# Altium PCB Cuttomized_Industrial_controller.PcbDoc (part 1 of 2)
Units mil, origin at the board's own origin, x right, y up, seen from the top; angles counter-clockwise.
Board outline 5820 x 4455 mil, 2 copper layers (Top Layer, Bottom Layer); 131 components, 106 nets, 448 pads, 121 vias.
Unrouted connection lines stored in the file: 64.
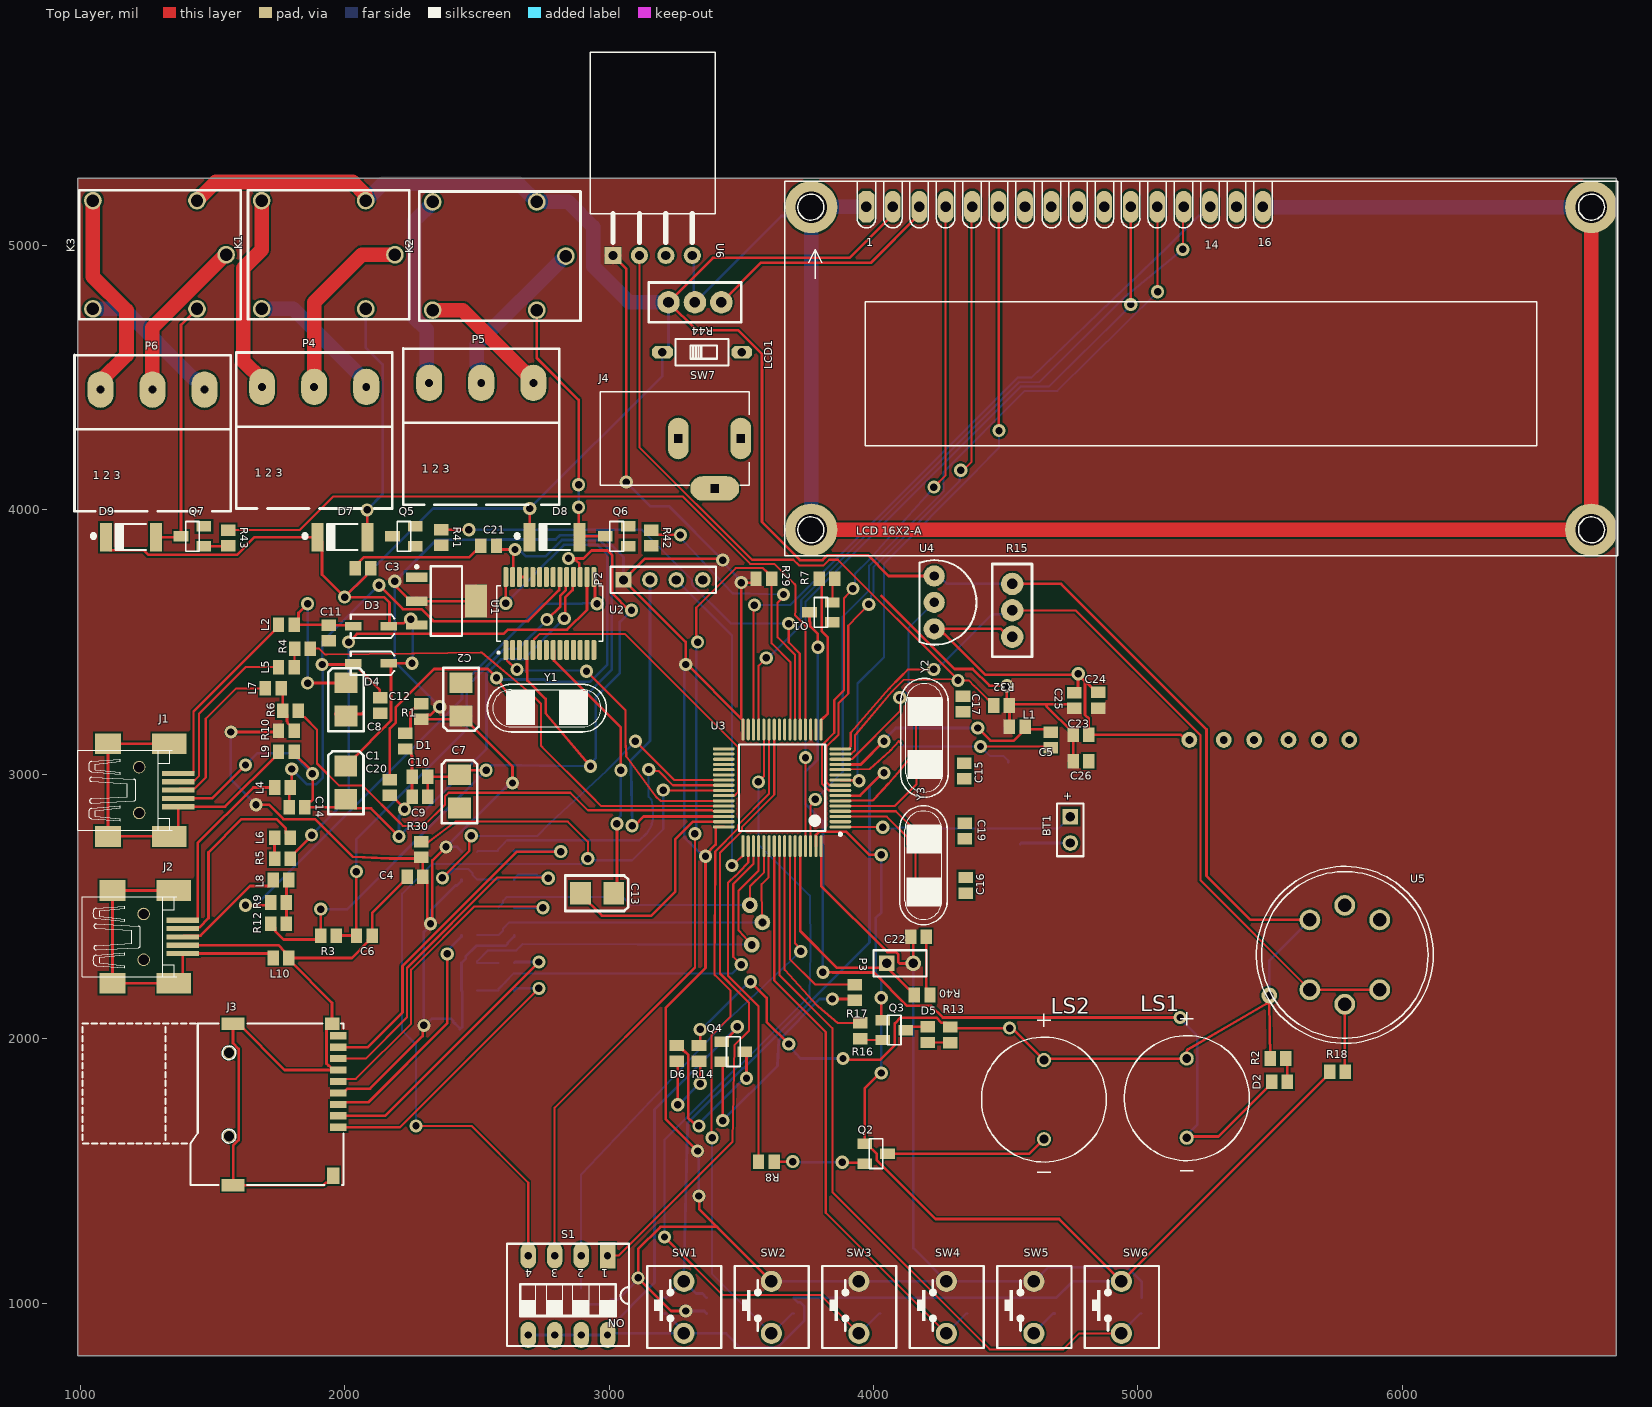
[diagram p0: Top Layer view]
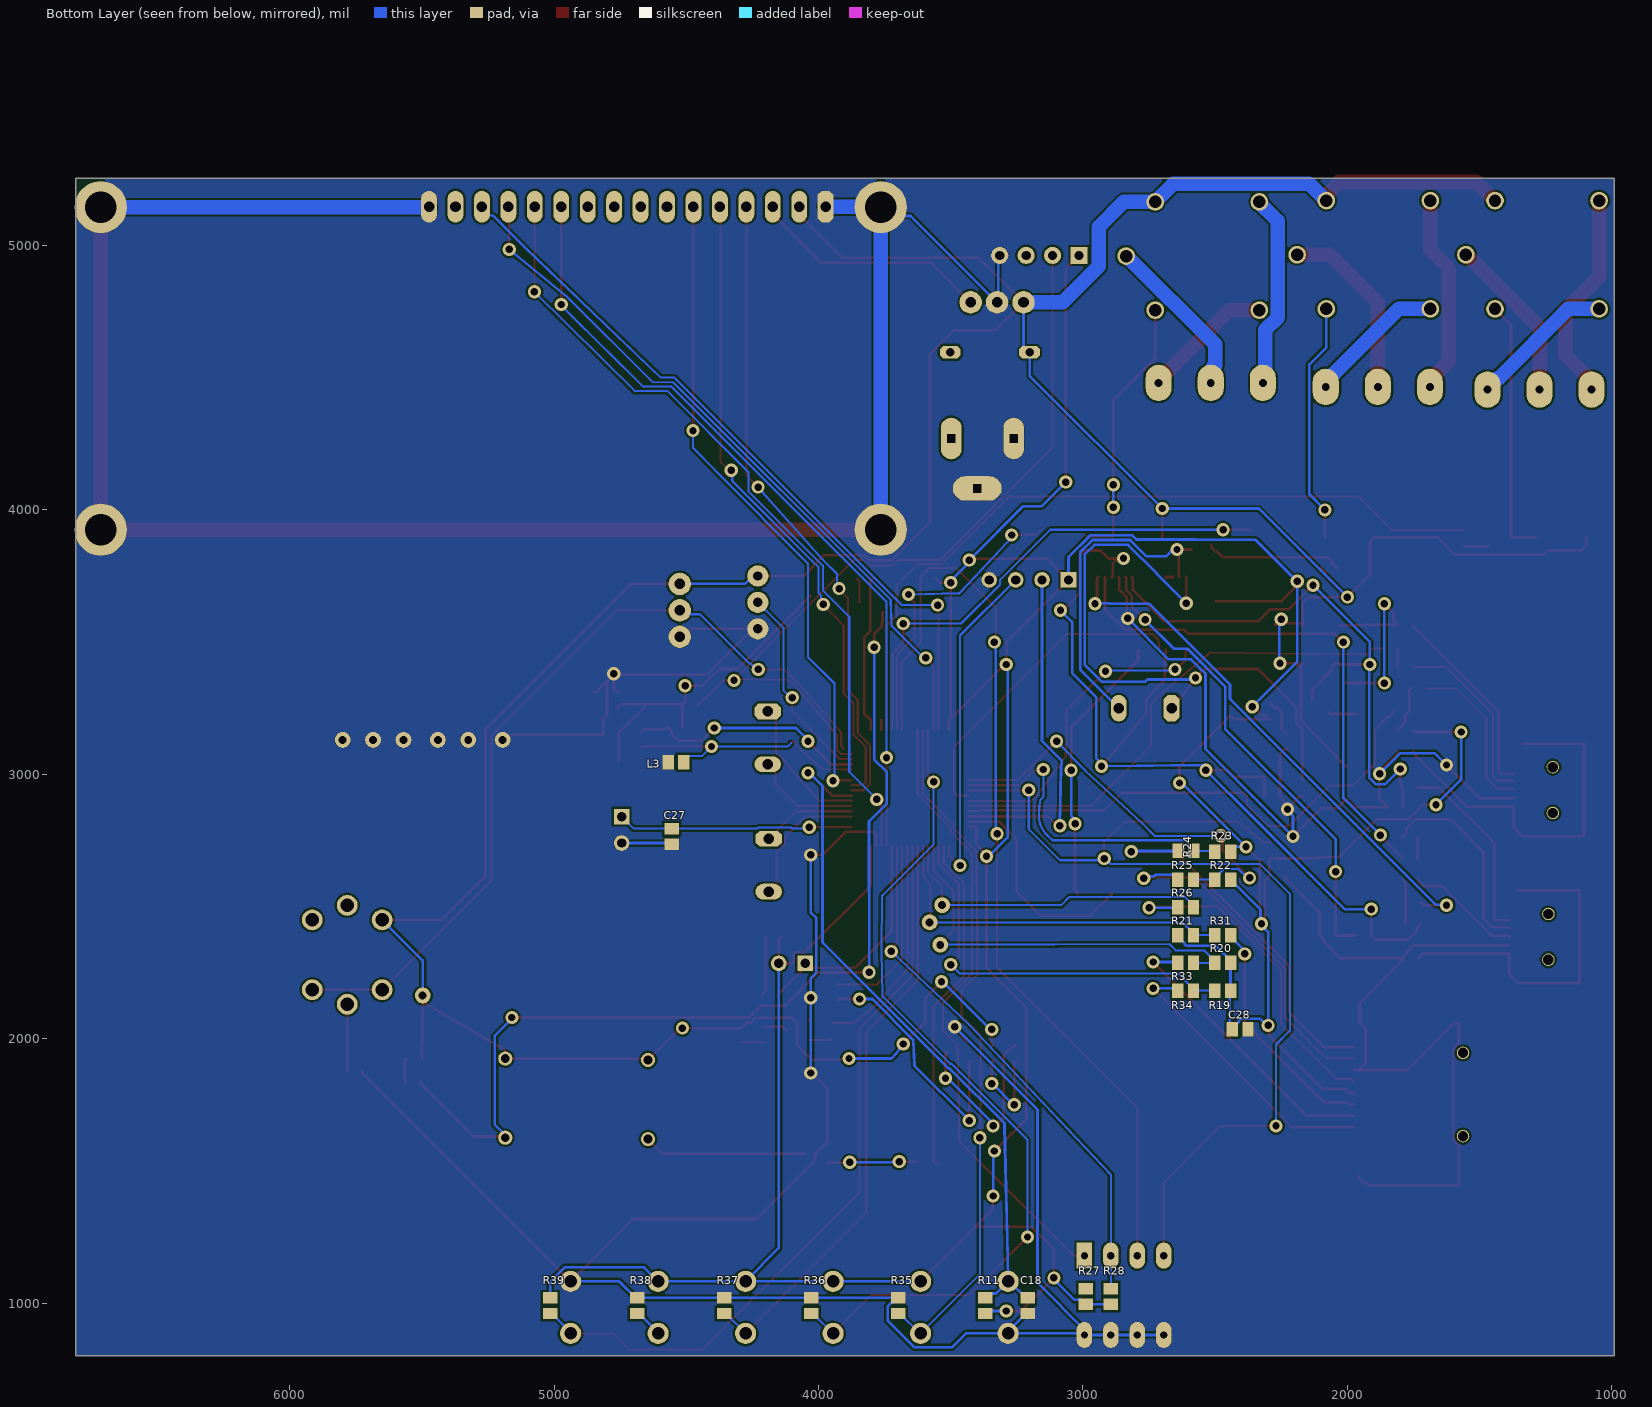
[diagram p1: Bottom Layer view, seen from below]

## Layer stack, top to bottom
Top Solder: solder mask 0.4, Solder Resist, Dk 3.5
Top Layer: signal copper 1.4
Dielectric 1: dielectric 12.6, FR-4, Dk 4.8
Bottom Layer: signal copper 1.4
Bottom Solder: solder mask 0.4, Solder Resist, Dk 3.5

## Board outline
990,800 990,5255 6810,5255 6810,800

## Design rules (kind name [scope] priority, off if disabled: settings)
Clearance Clearance_3 [InNamedPolygon('TOP GND_A')] p1: gap=40 ignorepadtopadclearanceinfootprint=FALSE
Clearance Clearance_2 [InNamedPolygon('TOP GND')] p2: gap=40 ignorepadtopadclearanceinfootprint=FALSE
Clearance Clearance_1 [InNamedPolygon('TOP GND')] p3: gap=40 ignorepadtopadclearanceinfootprint=FALSE
Clearance [All] p4: gap=8 ignorepadtopadclearanceinfootprint=FALSE
PolygonConnect [All vs IsNamedPolygon('TOP GND_A')] p1: thpad.connectstyle=Relief thpad.reliefconductorwidth=20 thpad.reliefentries=4 thpad.polygonreliefangle="90 Angle" thpad.airgapwidth=20 smdpad.connectstyle=Relief smdpad.reliefconductorwidth=20 smdpad.reliefentries=4 smdpad.polygonreliefangle="90 Angle" smdpad.airgapwidth=20 via.connectstyle=Direct via.reliefconductorwidth=10 via.reliefentries=4 via.polygonreliefangle="90 Angle" via.airgapwidth=10
PolygonConnect PolygonConnect_2 [All vs IsNamedPolygon('BOTTOM GND')] p2: thpad.connectstyle=Relief thpad.reliefconductorwidth=20 thpad.reliefentries=4 thpad.polygonreliefangle="90 Angle" thpad.airgapwidth=20 smdpad.connectstyle=Relief smdpad.reliefconductorwidth=20 smdpad.reliefentries=4 smdpad.polygonreliefangle="90 Angle" smdpad.airgapwidth=20 via.connectstyle=Direct via.reliefconductorwidth=10 via.reliefentries=4 via.polygonreliefangle="90 Angle" via.airgapwidth=10
PolygonConnect PolygonConnect_1 [All vs IsNamedPolygon('TOP GND')] p3: thpad.connectstyle=Relief thpad.reliefconductorwidth=20 thpad.reliefentries=4 thpad.polygonreliefangle="90 Angle" thpad.airgapwidth=20 smdpad.connectstyle=Relief smdpad.reliefconductorwidth=20 smdpad.reliefentries=4 smdpad.polygonreliefangle="90 Angle" smdpad.airgapwidth=20 via.connectstyle=Direct via.reliefconductorwidth=10 via.reliefentries=4 via.polygonreliefangle="90 Angle" via.airgapwidth=10
RoutingVias [All] p1: holewidth=28 width=50 viastyle="Through Hole" minholewidth=28 minwidth=50 maxholewidth=28 maxwidth=50
SolderMaskExpansion [All] p1: expansion=4 istentingtop=FALSE
Width [All] p1: maxlimit=55 minlimit=8 preferedwidth=10 minimp=50.000000 maximp=50.000000 favimp=50.000000
30 further rules are at their usual default settings.

## Components (designator, comment, footprint, x,y, rotation, side; value= is the part's Value field where it differs from the comment)
BT1 "Battery" BAT-2 4745.2,2790 r270 top
C1 "10uF" CAP_tantal 2004.49,2968.52 r270 top
C2 "10uF" CAP_tantal 2440,3282.99 r90 top
C3 "" C0805 2069.57,3780 r0 top value=100nF
C4 "" C0805 2266.38,2613.11 r0 top value=100nF
C5 "" C0805 4670,3129.53 r90 top value="100 nF"
C6 "Cap" C0805 2074.57,2390 r180 top value=100nF
C7 "10uF" CAP_tantal 2435,2935 r270 top
C8 "10uF" CAP_tantal 2005,3282.99 r270 top
C9 "Cap" C0805 2284.57,2915 r0 top value=100nF
C10 "Cap" C0805 2284.57,2990 r0 top value=100nF
C11 "" C0805 1940,3534.53 r90 top value=100nF
C12 "" C0805 2135,3260 r90 top value=100nF
C13 "10uF" CAP_tantal 2955,2550 r180 top
C14 "" C0805 1820.47,2875 r180 top value=100nF
C15 "Cap" C0805 4343.82,3012.27 r90 top value=18pF
C16 "Cap" C0805 4350,2580 r270 top value=18pF
C17 "Cap" C0805 4338.82,3266.33 r270 top value=18pF
C18 "" C0805 3209.57,990 r90 bottom value="100 nF"
C19 "Cap" C0805 4345,2785 r270 top value=18pF
C20 "Cap" C0805 2170.86,2950 r90 top value=10pF
C21 "Cap" C0805 2545,3865 r0 top value=10pF
C22 "" C0805 4170,2385 r180 top value="100 nF"
C23 "" C0805 4785.47,3150 r180 top value="100 nF"
C24 "" C0805 4850,3280 r270 top value="100 nF"
C25 "" C0805 4760,3279.53 r270 top value="100 nF"
C26 "" C0805 4785,3050 r180 top value="100 nF"
C27 "" C0805 4555,2765 r90 bottom value="100 nF"
C28 "Cap" C0805 2405.47,2035 r0 bottom value=100nF
D1 "LED0" C0805 2230,3125 r270 top
D2 "LED0" C0805 5535.47,1836.94 r180 top
D3 "Diode 1N4148" SOD-123 2100,3560 r0 top
D4 "Diode 1N4148" SOD-123 2100,3420 r0 top
D5 "LED0" C0805 4205,2015 r90 top
D6 "LED0" C0805 3255.5,1944.65 r90 top
D7 "SUF4007" DIOMELF5025N 1991.58,3897.05 r0 top
D8 "SUF4007" DIOMELF5025N 2794.57,3897.05 r0 top
D9 "SUF4007" DIOMELF5025N 1191.58,3897.05 r0 top
J1 "Mini_USB" USB_mini 1223.11,2940.19 r0 top
J2 "Mini_USB" USB_mini 1240,2385 r0 top
J3 "MMC-uSD" SD-MicroSD_1 1769.39,1751.34 r270 top
J4 "DC-005" NINIGI_DC-005 3400,4270 r0 top
K1 "Relay" "Relay 5A" 1938.03,4965 r90 top
K2 "Relay" "Relay 5A" 2585,4960 r90 top
K3 "Relay" "Relay 5A" 1300,4965 r90 top
L1 "Inductor" C0805 4544.06,3180 r0 top value=10uH
L2 "FERRIT BEAD" C0805 1779.57,3565 r180 top
L3 "Inductor" C0805 4539.53,3045 r180 bottom value=10uH
L4 "FERRIT BEAD" C0805 1764.57,2950 r180 top
L5 "FERRIT BEAD" C0805 1779.57,3405 r180 top
L6 "FERRIT BEAD" C0805 1764.57,2760 r0 top
L7 "FERRIT BEAD" C0805 1730,3325 r180 top
L8 "FERRIT BEAD" C0805 1759.57,2600 r180 top
L9 "FERRIT BEAD" C0805 1779.57,3085 r180 top
L10 "FERRIT BEAD" C0805 1759.57,2305 r180 top
LCD1 "LCD2x16" "LCD 2*16" 5133.35,4506.69 r0 top
LS1 "AI-1223-TWT-12V-R" XDCR_AI-1223-TWT-12V-R 5185,1775 r0 top
LS2 "AI-1223-TWT-12V-R" XDCR_AI-1223-TWT-12V-R 4645,1769.61 r0 top
P2 "Header 4" HDR1X4 3055,3735 r0 top
P3 "Header 2" HDR1X2 4050.8,2284.53 r0 top
P4 "Header 3" "phoenix terminal 3" 1590,4005 r0 top
P5 "Header 3" "phoenix terminal 3" 2221.85,4020 r0 top
P6 "Header 3" "phoenix terminal 3" 978.15,3995 r0 top
Q1 "BC107" SOT23 3801.69,3612.4 r90 top
Q2 "BC107" SOT23 4010,1565 r270 top
Q3 "BC107" SOT23 4078.31,2032.4 r270 top
Q4 "BC107" SOT23 3470.5,1950.55 r270 top
Q5 "MMBT2222A" SOT23 2224.57,3900 r90 top
Q6 "MMBT2222A" SOT23 3029.57,3900 r90 top
Q7 "MMBT2222A" SOT23 1424.57,3900 r90 top
R1 "330" C0805 2289.87,3237.99 r270 top
R2 "" C0805 5530,1925 r0 top value=220
R3 "" C0805 1939.57,2390 r0 top value=10K
R4 "" C0805 1840.47,3475 r0 top value=22
R5 "" C0805 1764.57,2680 r0 top value=22
R6 "" C0805 1795,3240 r0 top value=22
R7 "" C0805 3825,3740 r180 top value=1K
R8 "" C0805 3595,1535 r180 top value=1K
R9 "" C0805 1750.47,2515 r180 top value=22
R10 "" C0805 1779.57,3164.17 r180 top value=1.5K
R11 "10 K" C0805 3369.57,990 r270 bottom
R12 "" C0805 1750,2435 r180 top value=1.5K
R13 "" C0805 4290,2014.53 r270 top value=330
R14 "" C0805 3340.5,1944.65 r270 top value=330
R15 "1k" Multi-Turn 4525,3620 r270 top
R16 "" C0805 3950,2030 r270 top value=1K
R17 "" C0805 3930,2174.53 r270 top value=1K
R18 "" C0805 5755,1875 r0 top value=33
R19 "" C0805 2471.5,2181.67 r0 bottom value=10K
R20 "" C0805 2471.5,2286.67 r0 bottom value=10K
R21 "" C0805 2611.5,2391.67 r180 bottom value=10K
R22 "" C0805 2471.5,2601.67 r0 bottom value=10K
R23 "" C0805 2471.5,2706.67 r0 bottom value=10K
R24 "" C0805 2610,2710 r0 bottom value=22
R25 "" C0805 2611.5,2601.67 r0 bottom value=22
R26 "" C0805 2611.5,2496.67 r0 bottom value=22
R27 "" C0805 2989.57,1025 r90 bottom value=10K
R28 "" C0805 2894.57,1025 r90 bottom value=10K
R29 "" C0805 3585.47,3740 r0 top value=10K
R30 "" C0805 2290,2715 r90 top value=10K
R31 "" C0805 2471.5,2391.67 r180 bottom value=22
R32 "" C0805 4485,3260 r0 top value=5K
R33 "" C0805 2611.5,2286.67 r0 bottom value=22
R34 "" C0805 2611.5,2181.67 r0 bottom value=22
R35 "" C0805 3698.57,990 r90 bottom value=10K
R36 "" C0805 4027.57,990 r90 bottom value=10K
R37 "" C0805 4356.57,990 r90 bottom value=10K
R38 "" C0805 4685.57,990 r90 bottom value=10K
R39 "" C0805 5014.57,990 r90 bottom value=10K
R40 "" C0805 4184.53,2165 r0 top value=10K
R41 "" C0805 2365,3895 r270 top value=1K
R42 "" C0805 3159.57,3894.09 r270 top value=1K
R43 "" C0805 1559.57,3894.09 r270 top value=1K
R44 "RPot" Multi-Turn 3325,4785 r0 top value=1K
S1 "SW DIP-4" "dip switch x4" 6519.57,2064.21 r180 top
SW1 "?" "Sw_Tact 2PIN" 3284.57,980 r0 top
SW2 "?" "Sw_Tact 2PIN" 3615.57,980 r0 top
SW3 "?" "Sw_Tact 2PIN" 3946.57,980 r0 top
SW4 "?" "Sw_Tact 2PIN" 4277.57,980 r0 top
SW5 "?" "Sw_Tact 2PIN" 4608.57,980 r0 top
SW6 "?" "Sw_Tact 2PIN" 4939.57,980 r0 top
SW7 "SW-SPST" "DSW 1" 3356.84,4600.97 r270 top
U1 "AMS1117" SOT223_L 2385,3655 r0 top
U2 "PL-2303" SOP65P780X200-28N 2776.02,3607.99 r90 top
U3 "STM32F103RET6" LQFP64 3654.53,2948.58 r180 top
U4 "LM35" TO-92 4230,3650 r270 top
U5 "MQ-2" SNR6-D19.0MM 5782.91,2317.09 r0 top
U6 "TEM-HUM-DHT11(4P-15.5X12.0MM)" SNR4-2.54-15.5X12.0X5.5MM 3165,5425 r90 top
Y1 "12MHz" Xtal 2771,3241 r0 top
Y2 "8 MHz" Xtal 4183.82,3131.8 r270 top
Y3 "8 MHz" Xtal 4180,2650 r270 top

## Footprints (in the part's own frame and the unit in brackets; to place one, negate y for a bottom-side part, rotate by r counter-clockwise, add the part's x,y. Pads: shape width x height; smd on the part's side, far side on the other; paste and mask are expansions set on the pad)
BAT-2 [mm] "Battery; 2 Leads"
  rect 1.5x1.5 hole 0.9: 1(-1.27,0)
  round 1.5 hole 0.9: 2(1.27,0)
  silkscreen extent -2.54,-1.27 2.54,1.27
C0805 [mm] "Chip Capacitor, Body 2.0x1.3mm, IPC High Density"
  rect 1.1x1.4 smd: 1(-0.75,0) 2(0.75,0)
  body extent -1.1,-0.72 1.1,0.72, height 1.4
CAP_tantal [mm] "Capacitor 3.5x2.8mm (B-Case)"
  rect 2x2.2 smd paste+0.038 mask+0.038: 1(1.6,0) 2(-1.6,0)
  silkscreen extent -3,-1.7 3.05,1.7, body extent -1.77,-1.41 1.79,1.41, height 0.65
DIOMELF5025N [mm]
  rect 1.15x2.75 smd: A(2.4,0) C(-2.4,0)
  silkscreen extent -3.92,-1.25 1.45,1.25
"dip switch x4" [mm]
  rect 1.5x2.5 hole 0.7: 1(89.535,22.479)
  oval 1.5x2.5 hole 0.7: 2(92.075,22.479) 3(94.615,22.479) 4(97.155,22.479) 5(97.155,30.099) 6(94.615,30.099) 7(92.075,30.099) 8(89.535,30.099)
  silkscreen extent 87.49,21.34 99.19,31.15, body extent 87.54,21.34 99.15,31.24, height 6.8
"DSW 1" [mm]
  oct 1.2x2 hole 0.8: 1(0.12,-3.935) 2(0.12,3.685)
  silkscreen extent -1.15,-2.67 1.4,2.41, body extent -1.17,-5.08 1.37,4.82, height 7.4
HDR1X2 [mm] "Connector; Header; 2 Position"
  rect 1.5x1.5 hole 0.9: 1(0,0)
  round 1.5 hole 0.9: 2(2.54,0)
  silkscreen extent -1.27,-1.27 3.81,1.27
HDR1X4 [mm] "Connector; Header; 4 Position"
  rect 1.5x1.5 hole 0.9: 1(0,0)
  round 1.5 hole 0.9: 2(2.54,0) 3(5.08,0) 4(7.62,0)
  silkscreen extent -1.27,-1.27 8.89,1.27
"LCD 2*16" [mil] "LCD"
  round 196.85 hole 118.11: 1(-1368.35,-581.69) 1(-1368.35,638.31) 1(1581.65,-581.69) 1(1581.65,638.31)
  oct 60x120 hole 40: 1(-1160,640)
  oval 60x120 hole 40: 2(-1060,640) 3(-960,640) 4(-860,640) 5(-760,640) 6(-660,640) 7(-560,640) 8(-460,640) 9(-360,640) 10(-260,640) 11(-160,640) 12(-60,640) 13(40,640) 14(140,640) 15(240,640) 16(340,640)
  silkscreen extent -1468,-681 1681,737, body extent -1470,-681 1679,736, height 453
LQFP64 [mm] "Thin QFP, 64-Leads, Body 10x10mm, Pitch 0.5mm, IPC Low Density"
  oval 2.1x0.3 smd: 1(-5.6,3.75) 2(-5.6,3.25) 3(-5.6,2.75) 4(-5.6,2.25) 5(-5.6,1.75) 6(-5.6,1.25) 7(-5.6,0.75) 8(-5.6,0.25) 9(-5.6,-0.25) 10(-5.6,-0.75) 11(-5.6,-1.25) 12(-5.6,-1.75) 13(-5.6,-2.25) 14(-5.6,-2.75) 15(-5.6,-3.25) 16(-5.6,-3.75) 33(5.6,-3.75) 34(5.6,-3.25) 35(5.6,-2.75) 36(5.6,-2.25) 37(5.6,-1.75) 38(5.6,-1.25) 39(5.6,-0.75) 40(5.6,-0.25) 41(5.6,0.25) 42(5.6,0.75) 43(5.6,1.25) 44(5.6,1.75) 45(5.6,2.25) 46(5.6,2.75) 47(5.6,3.25) 48(5.6,3.75)
  oval 0.3x2.1 smd: 17(-3.75,-5.6) 18(-3.25,-5.6) 19(-2.75,-5.6) 20(-2.25,-5.6) 21(-1.75,-5.6) 22(-1.25,-5.6) 23(-0.75,-5.6) 24(-0.25,-5.6) 25(0.25,-5.6) 26(0.75,-5.6) 27(1.25,-5.6) 28(1.75,-5.6) 29(2.25,-5.6) 30(2.75,-5.6) 31(3.25,-5.6) 32(3.75,-5.6) 49(3.75,5.6) 50(3.25,5.6) 51(2.75,5.6) 52(2.25,5.6) 53(1.75,5.6) 54(1.25,5.6) 55(0.75,5.6) 56(0.25,5.6) 57(-0.25,5.6) 58(-0.75,5.6) 59(-1.25,5.6) 60(-1.75,5.6) 61(-2.25,5.6) 62(-2.75,5.6) 63(-3.25,5.6) 64(-3.75,5.6)
  silkscreen extent -5.72,-4.15 4.15,4.57, body extent -6,-6 6,6, height 1.6
Multi-Turn [mil]
  round 85 hole 40: 1(-100,0) 2(0,0) 3(100,0)
  silkscreen extent -175,-75 175,75, body extent -181,-94 181,94, height 530
NINIGI_DC-005 [mm]
  oval 4.7x2.35 hole 0.8 square: 2(0,-4.8)
  oval 2x4 hole 0.8 square: 3(-3.5,0) 4(2.5,0)
  silkscreen extent -11,-4.5 3.3,4.5
"phoenix terminal 3" [mil] "3 terminals"
  oval 98.43x137.8 hole 30: 1(98.15,460) 2(295,460) 3(491.85,460)
  silkscreen extent 0,0 591,591
"Relay 5A" [mm] "Relay"
  round 1.7 hole 1.2: 1(0,-6.4) 2(5.2,6.4) 3(-5.2,6.4) 4(5.2,-3.6) 5(-5.2,-3.6)
  silkscreen extent -6.2,-7.8 6.2,7.7
SD-MicroSD_1 [mm]
  rect 0.7x1.6 smd: 1(2.2,5.25) 2(1.1,5.25) 3(0,5.25) 4(-1.1,5.25) 5(-2.2,5.25) 6(-3.3,5.25) 7(-4.4,5.25) 8(-5.5,5.25) 9(-6.6,5.25)
  rect 1.2x1.4 smd: sh1(-7.75,4.65)
  rect 1.2x2.2 smd: sh2(-7.75,-4.85) sh3(7.75,-4.85)
  rect 1.6x1.2 smd: sh4(6.85,4.75)
  round 1.2 hole 1: ""(-4.95,-5.25) ""(3.05,-5.25)
  silkscreen extent -7.77,-19.32 7.74,5.77
SNR4-2.54-15.5X12.0X5.5MM [mil]
  rect 65x65 hole 35: 1(-462.6,150)
  round 65 hole 35: 2(-462.6,50) 3(-462.6,-50) 4(-462.6,-150)
  silkscreen extent -413,-236 305,236
SNR6-D19.0MM [mm]
  round 2 hole 1.3: 1(-3.355,3.355) 2(-3.355,-3.355) 3(3.355,3.355) 4(3.355,-3.355) 5(0,4.75) 6(0,-4.75)
  silkscreen extent -8.5,-8.5 8.5,8.5
SOD-123 [mm] "SOD-123; 2 Leads; Body 2.7 x 1.6 mm, (LxW)"
  rect 1.6x0.8 smd: 1(-1.7,0) 2(1.7,0)
  silkscreen extent -1.95,-1.13 2.24,1.13, body extent -1.87,-0.86 1.98,0.84, height 1.43
SOP65P780X200-28N [mm]
  rrect50% 1.9x0.48 smd: 1(-3.505,4.225) 2(-3.505,3.575) 3(-3.505,2.925) 4(-3.505,2.275) 5(-3.505,1.625) 6(-3.505,0.975) 7(-3.505,0.325) 8(-3.505,-0.325) 9(-3.505,-0.975) 10(-3.505,-1.625) 11(-3.505,-2.275) 12(-3.505,-2.925) 13(-3.505,-3.575) 14(-3.505,-4.225) 15(3.505,-4.225) 16(3.505,-3.575) 17(3.505,-2.925) 18(3.505,-2.275) 19(3.505,-1.625) 20(3.505,-0.975) 21(3.505,-0.325) 22(3.505,0.325) 23(3.505,0.975) 24(3.505,1.625) 25(3.505,2.275) 26(3.505,2.925) 27(3.505,3.575) 28(3.505,4.225)
  silkscreen extent -3.85,-5.1 2.65,5.1
SOT23 [mm]
  rect 1x1.4 smd: 1(-0.95,-1.1) 2(0.95,-1.1) 3(0,1.1)
  silkscreen extent -1.42,-0.66 1.42,0.66
SOT223_L [mm] "SOT223, 4-Leads, Body 6.5x3.5mm, Pitch 2.3mm, Lead Span 7mm, IPC High Density"
  rect 2.1x0.9 smd: 1(-2.85,2.3) 2(-2.85,0) 3(-2.85,-2.3)
  rect 2.1x3.2 smd: 4(2.85,0)
  silkscreen extent -2.97,-3.35 1.5,3.42, body extent -1.85,-3.35 1.85,3.35, height 1.7
"Sw_Tact 2PIN" [mil]
  round 80 hole 47.24: 1(-1.36,-94.82) 2(-1.36,102.08)
  silkscreen extent -140,-150 140,160, body extent -118,-113 126,123, height 433
TO-92 [mil]
  round 80 hole 35.43: 1(-100,0) 2(0,0) 3(100,0)
  silkscreen extent -160,-55 160,160, body extent -109,-62 109,98, height 142
USB_mini [mm]
  rect 3.1x0.5 smd: 1(3.762,1.6) 2(3.762,0.8) 3(3.762,0) 4(3.762,-0.8) 5(3.762,-1.6)
  rect 2.5x2 smd: 5(-3,-4.45) 5(-3,4.45)
  rect 3.3x2 smd: 5(2.9,-4.45) 5(2.9,4.45)
  round 1.2 hole 1 unplated: ""(0,-2.2) ""(0,2.2)
  silkscreen extent -5.92,-3.85 3.16,3.85, body extent -5.9,-5.35 3.3,5.35, height 3.95
XDCR_AI-1223-TWT-12V-R [mm]
  round 1.358 hole 0.85: N(0,-3.8) P(0,3.8)
  silkscreen extent -6,-6.98 6,8.26, body extent -6,-7.44 6,6, height 8.94
Xtal [mil]
  oct 60x100 hole 40: 1(-106,9)
  oval 60x100 hole 40: 2(94,9)
  silkscreen extent -231,-81 219,99, body extent -215,-51 205,69, height 161

## Part data
BT1: "Multicell Battery", LatestRevisionDate=17-Jul-2002, LatestRevisionNote="Re-released for DXP Platform.", PackageReference=BAT-2, Published=24-Mar-1999, Publisher="Altium Limited"
C1 C2 C7 C8 C13: library part "Cap Elec", "Capacitor"
C3 C4 C5: library part "Cap Semi", "Capacitor (Semiconductor SIM Model)", LatestRevisionDate=29-May-2009, LatestRevisionNote="IPC-7351 Footprint Added.", PackageDescription="Chip Capacitor", PackageReference=C1206, Published=8-Jun-2000, Publisher="Altium Limited"
C6 C9 C10 C15 C16 C17 C19 C20 C21 C28: "Capacitor", LatestRevisionDate=17-Jul-2002, LatestRevisionNote="Re-released for DXP Platform.", PackageDescription="Radial Cap, Thru-Hole; 2 Leads; 0.3 in Pin Spacing", PackageReference=RAD-0.3, Published=8-Jun-2000, Publisher="Altium Limited"
C11 C12 C14 C18 C22 C23 C24 C25 C26 C27: library part Cap, "Capacitor", LatestRevisionDate=17-Jul-2002, LatestRevisionNote="Re-released for DXP Platform.", PackageDescription="Radial Cap, Thru-Hole; 2 Leads; 0.3 in Pin Spacing", PackageReference=RAD-0.3, Published=8-Jun-2000, Publisher="Altium Limited"
D1 D2 D5 D6: "Typical INFRARED GaAs LED", LatestRevisionDate=08-Jul-2005, LatestRevisionNote="Mech Layer 1 removed.", PackageDescription="LED; 2 Leads", PackageReference=LED-0, Published=8-Jun-2000, Publisher="Altium Limited"
D3 D4: "High Conductance Fast Diode", Code_JEDEC=DO-204-AH, ComponentLink1Description="Manufacturer Link", ComponentLink1URL=http://www.fairchildsemi.com/, ComponentLink2Description=Datasheet, ComponentLink2URL=http://www.fairchildsemi.com/ds/1N%2F1N4148.pdf, DatasheetVersion=1997, LatestRevisionDate=17-Jul-2002, LatestRevisionNote="Re-released for DXP Platform.", PackageDescription="Diode, Axial; Body 3.8 x 1.9 mm (LxDia. max), Lead Dia. 0.53 mm (max)", PackageReference=DO-35, Published=8-Jun-2000, Publisher="Altium Limited"
D7 D8 D9: "Diode Switching 1KV 1A Automotive 2-Pin MELF", Package="DO-213 Diotec", Availability=Unavailable, MF=Diotec, MP=SUF4007, Price=None, SnapEDA_Link=https://www.snapeda.com/parts/SUF4007/Diotec/view-part/423373/?ref=snap
J1 J2: library part USB_Mini, "USB 2.0, Right Angle, SMT, B Type, Receptacle, 5 Position, Black", PackageDocument=27-Jun-2003, ComponentLink1Description="Manufacturer Link", ComponentLink1URL=http://www.tycoelectronics.com/, ComponentLink2Description="Packaging Specification", ComponentLink2URL=http://ecommas.tycoelectronics.com/commerce/DocumentDelivery/DDEController?Action=showdoc&DocId=Customer+Drawing%7F440247%7FD%7Fpdf%7FEnglish%7FC_440247_D.pdf, ContactMaterial="Copper Alloy", ContactPlating="Gold (30)", DatasheetDocument=27-Jun-2003, DrillSize="Corresponds to nominal value.", HousingMaterial=Thermoplastic, PackageReference=440247, PanelGround=Without, PCB_Layout="Complies with manufacturer's recommendation.", Published=15-Jul-2004, Publisher="Altium Limited"
J3: "uSD/MMC Socket"
J4: "DC Jack", Package=None, Availability=Unavailable, MP=DC-005, Price=None
K1 K2 K3: "SPDT Relay", LatestRevisionDate=17-Jul-2002, LatestRevisionNote="Re-released for DXP Platform.", PackageReference=MODULE5B, Published=8-Jun-2000, Publisher="Altium Limited"
L2 L4 L5 L6 L7 L8 L9 L10: library part Inductor, "Inductor", Code_IEC=1005, Code_JEITA=0402, LatestRevisionDate=29-May-2009, LatestRevisionNote="IPC-7351 Footprint Added.", PackageDescription="Chip Inductor", PackageReference=0402-A, Published=8-Jun-2000, Publisher="Altium Limited"
LS1 LS2: "ELECTRO-MECHANICAL AUDIO INDICATOR", Package="2225 PUI Audio", Availability="In Stock", MF="PUI Audio,", MP=AI-1223-TWT-12V-R, Price=None, Purchase-URL=https://pricing.snapeda.com/search/part/AI-1223-TWT-12V-R/?ref=eda
P2: "Header, 4-Pin", LatestRevisionDate=17-Jul-2002, LatestRevisionNote="Re-released for DXP Platform.", Publisher="Altium Limited"
P3: "Header, 2-Pin", LatestRevisionDate=17-Jul-2002, LatestRevisionNote="Re-released for DXP Platform.", Publisher="Altium Limited"
P4 P5 P6: "Header, 3-Pin", LatestRevisionDate=17-Jul-2002, LatestRevisionNote="Re-released for DXP Platform.", Publisher="Altium Limited"
Q5 Q6 Q7: "Bipolar _BJT_ Transistor NPN 40V 600mA 270MHz 350mW Surface Mount SOT-23-3", Package="TO-236-3 Taitron", Availability=Unavailable, MF=STMicroelectronics, MP=MMBT2222A, Price=None, SnapEDA_Link=https://www.snapeda.com/parts/MMBT2222A/STMicroelectronics/view-part/1642048/?ref=snap
R1 R11: library part RES
R2 R3 R4 R5 R6 R7 R8 R9 R10 R12 R13 R14 R16 R17 R18 R19 R20 R21 R22 R23 R24 R25 R26 R27 R28 R29 R30 R31 R32 R33 R34 R35 R36 R37 R38 R39 R40 R41 R42 R43: library part "Res Semi", "Semiconductor Resistor", LatestRevisionDate=17-Jul-2002, LatestRevisionNote="Re-released for DXP Platform.", PackageDescription="Axial Device, Thru-Hole; 2 Leads; 0.5 in Pin Spacing", PackageReference=AXIAL-0.5, Published=8-Jun-2000, Publisher="Altium Limited"
R15: library part POT, "Potentiometer"
R44: "Potentiometer", LatestRevisionDate=17-Jul-2002, LatestRevisionNote="Re-released for DXP Platform.", PackageDescription="Variable Resistor, Thru-Hole; 3 Leads", PackageReference=VR5, Published=8-Jun-2000, Publisher="Altium Limited", Set Position=0.5, Sim Note="Enter the Resistance value and the set point into parameter fields."
S1: "DIP Switch, 4 Position, SPST", Code_IPC=SOIC127P600-8, Code_JEDEC=MS-012-AA, LatestRevisionDate=29-May-2009, LatestRevisionNote="IPC-7351 Footprint Added.", PackageDescription="8-Pin Small Outline Integrated Circuit 1.27 mm Pitch", PackageReference=SO8, PackageVersion=Dec-2002, Published=24-Mar-1999, Publisher="Altium Limited"
SW1 SW2 SW3 SW4 SW5 SW6: library part "Micro Switch"
SW7: "Single-Pole, Single-Throw Switch", LatestRevisionDate=17-Jul-2002, LatestRevisionNote="Re-released for DXP Platform.", PackageDescription="Switch; 2 Leads", PackageReference=SPST-2, Published=24-Mar-1999, Publisher="Altium Limited"
U2: "USB to Serial Bridge Controller", Package=None, Availability=Unavailable, MF="Prolific Technology", MP=PL-2303, Price=None, SnapEDA_Link=https://www.snapeda.com/parts/PL-2303/Prolific%20Technology/view-part/598560/?ref=snap
U3: "STM32 ARM-based 32-bit MCU Performance Line with 512 kB Flash, 64 kB Internal RAM, -40 to +85°C Temperature, 64-Pin LQFP, Tray", ComponentLink1Description="Manufacturer URL", ComponentLink1URL=http://www.st.com/, ComponentLink2Description="STM32F103 Datasheet", ComponentLink2URL=http://www.st.com/internet/com/TECHNICAL_RESOURCES/TECHNICAL_LITERATURE/DATASHEET/CD00191185.pdf, ComponentLink3Description="STM32 Family Web Page", ComponentLink3URL=www.st.com/stm32, DatasheetVersion="rev8.0, Apr-2011", PackageDescription="64-Pin Low-Profile Quad Flat Pack, 10 x 10 mm Body, 0.5 mm Pitch (LQFP64)", PackageReference=LQFP64, PackageVersion="rev13, Apr-2011"
U5: library part DIP-GAS-MQ-2(6P-D19MM), "D-Sub MIL Spec Connectors Microminiature Series .050", Package=None, Availability="In Stock", Check_prices=https://www.snapeda.com/parts/MQ-2/AirBorn/view-part/?ref=eda, MF=AirBorn, MP=MQ-2, Price=None, Purchase-URL=https://pricing.snapeda.com/search/part/MQ-2/?ref=eda, SnapEDA_Link=https://www.snapeda.com/parts/MQ-2/AirBorn/view-part/?ref=snap
U6: "Servo AC 100 ~ 120VAC Supply 10A 120V Load", Package=None, Availability="In Stock", Check_prices=https://www.snapeda.com/parts/DHT11/Panasonic/view-part/6618018/?ref=eda, MF="Panasonic Industrial Automation Sales", MP=DHT11, Price=None, Purchase-URL=https://pricing.snapeda.com/search/part/DHT11/?ref=eda, SnapEDA_Link=https://www.snapeda.com/parts/DHT11/Panasonic/view-part/6618018/?ref=snap
Y1: library part XTAL, "Crystal Oscillator", LatestRevisionDate=17-Jul-2002, LatestRevisionNote="Re-released for DXP Platform.", PackageDescription="Crystal, Thru-Hole; 2 Leads; Body 3.1 x 8.2 mm (Dia.xH)", PackageReference=R38, Published=8-Jun-2000, Publisher="Altium Limited"
Y2 Y3: library part XTAL, "12 MHz", LatestRevisionDate=17-Jul-2002, LatestRevisionNote="Re-released for DXP Platform.", PackageDescription="Crystal, Thru-Hole; 2 Leads; Body 3.1 x 8.2 mm (Dia.xH)", PackageReference=R38, Published=8-Jun-2000, Publisher="Altium Limited"
L1 L3: Code_IEC=1005, Code_JEITA=0402, LatestRevisionDate=29-May-2009, LatestRevisionNote="IPC-7351 Footprint Added.", PackageDescription="Chip Inductor", PackageReference=0402-A, Published=8-Jun-2000, Publisher="Altium Limited"

## Free pads (board coordinates)
  round 60 hole 30: 2(3540,2355) 3(3580,2440) 4(3532.84,2504.99) 5(5497.4,2163.32) 6(5195,3130) 6(5325,3130) 6(5440,3130) 6(5570,3130) 6(5685,3130) 6(5800,3130)

## Via types
v1: diameter 50, hole 28, Top Layer to Bottom Layer, 121 vias

## Nets (pads, with @x,y where several pads share a name; then routed paths per layer and width w, separated by ;. In a path a pad name is that pad's centre, name@x,y a point inside that pad or via, vN(x,y) a via of type N, cw(c..) or ccw(c..) an arc to the next point about the centre after c; other vN are vias at no path point)
3V3: C2.2 C4.2 C22.2 C23.2 C24.2 C25.2 C26.2 C28.2 J3.4 L1.1 P2.1 P3.2 R1.2 R10.2 R11.2 R19.1 R20.1 R21.1 R22.1 R23.1 R27.1 R28.1 R29.1 R30.1 R32.2 R39.2 SW2.2 SW3.2 SW4.2 SW5.2 U1.2 U1.4 U3.19 U3.32 U3.48 U3.64 U6.1 | length 18323.1
  Top Layer w10: v1(1570,3160) 1745.87,3160 R10.2@1750.04,3164.17 ; v1(1665,2885) 1713.35,2885 1768.35,2830 1888.74,2830 2030.34,2688.4 2170.09,2681.17 2267.44,2681.17 R30.1@2290,2685.47 2295.91,2679.57 C4.2@2295.91,2613.11 2312,2597.02 2312,2448 v1(2325,2435) 2332,2442 2332,2673.61 v1(2383.59,2725.2) ; J3.4@1976.08,1794.65 1993.8,1794.65 2010.32,1811.17 2096.17,1811.17 2295,2010 2295,2045 v1(2300,2050) ; v1(2190,3730) 2197.65,3722.35 2197.65,3706.52 2249.17,3655 U1.2@2272.8,3655 U1.4@2497.2,3655 ; R1.2@2289.87,3208.46 R1.2@2308.46,3208.46 ; v1(2360,3255) 2355,3255 2324.38,3224.38 2312.43,3224.38 2308.46,3220.42 R1.2@2308.46,3208.46 ; v1(2635,2967) 2635,3028.94 2443.94,3220 C2.2@2440,3220 2428.46,3208.46 R1.2@2308.46,3208.46 ; U6.1@3015,4962.4 3065,4912.4 v1@3065,4095 ; v1(3290,970) 3235,970 v1(3110,1095) 3110,1203.74 3194.26,1288 3408.28,1288 ; v1(3290,3415) 3290,3500 P2.1@3055,3735 3135,3815 3425,3815 v1(3430,3810) ; v1@3293.04,3418.53 3500,3211.57 ; v1(3335,1575) 3214.94,1695.06 3214.94,2117.5 3365,2267.56 v1(3365,2690) 3365,2695.18 3403.62,2733.8 3403.62,2800.11 3404.46,2800.94 U3.48@3434.06,2800.94 ; v1(3340,1405) 3341.28,1403.72 3341.28,1355 3408.28,1288 ; U3.32@3506.89,3203.9 U3.32@3506.89,3169.06 3506.89,3204.36 3500,3211.25 3500,3211.57 ; U3.32@3506.89,3204.68 3500,3211.57 ; R29.1@3555.94,3740 3540.94,3725 v1(3500,3725) 3500,3211.57 ; SW2.2@3614.2,1082.08 3408.28,1288 ; U3.19@3762.8,3169.06 3763.14,3169.4 3763.14,3206.12 U3.19@3763.57,3206.55 ; U3.64@3802.17,2728.11 3802.17,2577.83 4052.94,2327.06 4085.71,2327.06 4093.33,2319.44 4093.33,2290.39 4099.19,2284.53 P3.2@4150.8,2284.53 4150.8,2374.67 C22.2@4140.47,2385 ; 4030.86,3674.19 4177,3528.05 4307.05,3398 4375.74,3398 4438.74,3335 v1(4505,3335) 4505,3274.53 R32.2@4514.53,3265 ; L1.1@4514.53,3180 R32.2@4514.53,3265 ; R32.2@4514.53,3260 R32.2@4514.53,3265 ; R32.2@4517.48,3262.95 4519.53,3265 4650,3265 ; C26.2@4755.47,3050 4755.47,3149.53 C23.2@4755.94,3150 4755.94,3155.91 4655,3256.85 4650,3265 ; C25.2@4760,3250 4745,3265 4650,3265
  Bottom Layer w10: v1(1570,3160) 1570,2980 v1(1665,2885) ; v1(2360,3255) 2190,3425 v1(2190,3730) 2347,3887 2572.17,3887 2573.17,3888 2798.35,3888 2814.35,3904 2971.91,3904 3055,3820.91 P2.1@3055,3735 ; v1(2383.59,2725.2) 2625.39,2967 v1(2635,2967) ; v1@2388.39,2725.2 2425.32,2725.2 2441.98,2708.55 R23.1@2441.98,2706.67 ; R22.1@2441.98,2601.67 2441.98,2595.76 2425.32,2579.11 2419.42,2579.11 2328.44,2488.13 2328.44,2438.44 v1(2325,2435) 2325,2428.43 2300,2403.43 v1(2300,2050) 2305.45,2050 2331.01,2075.56 2402.98,2075.56 2410.6,2067.94 2410.6,2063.42 2416.46,2057.56 2418.35,2057.56 2435,2040.91 C28.2@2435,2035 2445,2045 2445,2178.65 R19.1@2441.98,2181.67 R20.1@2441.98,2286.67 2458.63,2303.32 2458.63,2311.87 2497.88,2351.11 2609.02,2351.11 2616.63,2358.73 2616.63,2361.36 2641.03,2385.76 R21.1@2641.03,2391.67 ; R28.1@2894.57,995.47 R27.1@2989.57,995.47 3006.22,1012.13 3032.13,1012.13 v1@3105,1085 ; v1(3065,4105) 3155.96,4014.04 3225.96,4014.04 v1(3430,3810) 3430,3802.5 3500,3732.5 v1(3500,3725) ; v1(3290,970) 3360.04,970 R11.2@3369.57,960.47 ; v1(3290,3415) 3285,3410 3285,2760 3355,2690 v1(3365,2690) ; v1(3335,1575) 3340,1570 v1(3340,1405) ; SW2.2@3614.2,1082.08 SW3.2@3945.2,1082.08 SW4.2@4276.2,1082.08 ; P3.2@4150.8,2284.53 4150.8,1207.48 SW4.2@4276.2,1082.08 ; R39.2@5014.57,1019.53 5014.57,1080.67 4960.16,1135.08 4660.2,1135.08 SW5.2@4607.2,1082.08 SW4.2@4276.2,1082.08
3V3_A: C5.2 L1.2 U3.13 | length 911.6
  Top Layer w10: U3.13@3875,3037.17 3952.17,3037.17 v1(4040,3125) ; v1(4395,3175) 4443,3127 4530.91,3127 4556.93,3153.02 4556.93,3163.35 L1.2@4573.58,3180 4583.58,3170 4659.06,3170 C5.2@4670,3159.06
  Bottom Layer w10: v1(4040,3125) 4040,3130 4085,3175 v1(4395,3175)
3V3U: C7.2 C9.2 C10.2 R3.1 R12.2 U2.4 U2.17 | length 3580.5
  Top Layer w10: R12.2@1720.47,2435 1737.13,2418.35 1737.13,2407.4 1769.53,2375 1895.04,2375 R3.1@1910.04,2390 R3.1@1910.04,2390 v1(1910,2490) ; C9.2@2314.09,2915 C10.2@2314.09,2990 2427.01,2990 C7.2@2435,2997.99 2452.01,3015 v1(2535,3015) ; U2.4@2686.46,3470 2689.6,3437.6 2689.6,3429.98 2690.12,3412.3 2690.93,3354.17 2760.27,3284.83 2760.27,3230.66 v1(2930,3030) ; v1(2846.87,3816.32) v1@2852.79,3816.32 ; U2.17@2891.18,3745.98 2888.04,3749.13 2888.04,3796.96 2876.06,3808.94 2860.18,3808.94 v1@2852.79,3816.32 ; v1(3085,3620) 3076.51,3620 3012.47,3684.04 3012.47,3827.53 2993.53,3846.47 2933.64,3846.47 2903.49,3816.32 v1@2852.79,3816.32
  Bottom Layer w10: v1(1910,2490) 2010.41,2490 2361.75,2841.35 2361.75,2841.75 v1(2535,3015) ; v1@2535,3035 2543.28,3035 2924.96,3030.35 2929.65,3030.35 v1(2930,3030) 2930,3040.82 2949.22,3060.05 2949.22,3290.07 3041.32,3382.16 3041.32,3576.32 v1(3085,3620)
5V0: C1.2 C3.2 D3.2 D4.2 D7.C D8.C D9.C K1.4 K2.4 K3.4 LCD1.2 LCD1.15 LS1.P LS2.P pad.5 R2.1 R13.1 R14.1 R15.1 R44.1 SW7.1 U1.3 U4.1 U5.1 U5.3 U5.5 | length 14982.6
  Top Layer w10: D9.C@1097.1,3897.05 1097.1,3865.55 1114.73,3847.91 1240.05,3847.91 1258.05,3829.91 1592.51,3829.91 1659.65,3897.05 D7.C@1897.1,3897.05 1914.73,3879.41 1914.73,3755.27 v1(2000,3670) ; C1.2@2004.49,3031.51 2008.42,3031.51 2042.79,3065.88 2042.79,3069.82 2152.86,3179.89 2152.86,3180.74 2175.56,3203.43 D4.2@2175.56,3411.37 ; C3.2@2099.09,3780 2082.44,3763.35 2082.44,3752.44 v1(2000,3670) ; D4.2@2166.93,3420 D4.2@2175.56,3411.37 ; D3.2@2166.93,3560 2177.68,3570.75 2223.64,3570.75 2239.18,3586.28 v1(2250,3586.28) 2271.84,3564.45 U1.3@2272.8,3564.45 ; D3.2@2170,3563.07 2170,3649.54 2149.54,3670 v1(2000,3670) ; v1(2255,3420) 2193.42,3420 2182.68,3420 2191.31,3411.37 D4.2@2175.56,3411.37 ; v1(2700,4005) 2700,3897.13 D8.C@2700.08,3897.05 ; R14.1@3340.5,1974.17 3345,1978.68 v1(3345,2035) ; v1(3535,2215) 3596.17,2153.83 3596.17,2063.83 v1(3680.18,1979.82) ; v1@3875,1920 4025.63,1920 4081.05,1975.43 4081.05,2057.47 4102.76,2079.18 4237.94,2079.18 4256.42,2060.71 4273.35,2060.71 R13.1@4290,2044.06 4294.06,2040 v1(4515,2040) 4524.21,2040 LS2.P@4645,1919.21 4650,1924.21 5175,1924.21 5180,1929.21 5180.52,1931.18 5187.3,1956.92 5190.13,1959.75 5487.31,2132.93 5490.14,2135.76 pad.5@5497.4,2163.32 5497.4,2140.82 5497.56,2140.82 5497.69,2140.82 R2.1@5500.47,1925 ; LCD1.2@4073.35,5146.69 4073.35,5116.69 3909.89,4953.24 3393.24,4953.24 R44.1@3225,4785 3330.09,4679.91 3487.79,4679.91 3578.53,4589.18 3578.53,3953.89 3722.42,3810 3807.58,3810 3826.14,3828.56 3979.32,3828.56 4057.88,3750 U4.1@4230,3750 ; R15.1@4525,3720 4710,3720 5260,3170 5260,2615 5425.83,2449.17 U5.1@5650.83,2449.17
  Top Layer w55: K3.4@1441.73,5169.72 1512.01,5240 2030,5240 2077.48,5192.52 2077.48,5172.01 K1.4@2079.76,5169.72
  Bottom Layer w10: v1(2000,3670) 2335,4005 v1(2700,4005) 3201.9,4506.9 SW7.1@3201.9,4596.24 3206.38,4596.24 3225,4614.86 R44.1@3225,4785 ; v1(2250,3586.28) 2257.5,3578.78 2257.5,3422.5 v1(2255,3420) ; v1(3345,2035) 3350,2035 3530,2215 v1(3535,2215) ; v1(3680.18,1979.82) 3707.01,1942.99 3725,1925 v1(3885,1925) ; U4.1@4230,3750 4247.78,3750 4277.78,3720 R15.1@4525,3720 ; pad.5@5497.4,2163.32 5497.4,2295.75 U5.1@5650.83,2449.17
  Bottom Layer w55: K1.4@2079.76,5169.72 2143.73,5233.69 2657.77,5233.69 K2.4@2726.73,5164.72 2845.28,5164.72 2940,5070 2940,4922.2 3077.2,4785 R44.1@3225,4785
5V0U: C12.2 C13.2 C14.2 D4.1 L4.1 U2.8 U2.20 | length 3303.2
  Top Layer w10: C14.2@1790.94,2875 1790.94,2946.85 L4.1@1794.09,2950 1794.09,2955.91 1800,2961.81 v1(1800,3020) ; v1(1915,3415) 2028.07,3415 D4.1@2033.07,3420 2046.55,3420 2057.3,3409.25 2057.3,3395.77 2132.75,3320.32 2132.75,3282.68 C12.2@2135,3280.43 ; v1(2130,3715) 2220.72,3624.28 2290.4,3624.28 2335.68,3579.01 2693.9,3579.01 2811.27,3696.37 2811.27,3742.84 U2.20@2814.41,3745.98 ; U2.8@2788.82,3470 2791.96,3466.86 2791.96,3429.98 3045.05,3176.89 v1(3045,3015) v1(3045,3015) ; C13.2@3017.99,2550 3030,2562.01 v1(3030,2813)
  Bottom Layer w10: v1(1800,3020) 1858,2962 1892,2962 1918,2988 1918,3412 v1(1915,3415) 1915,3500 v1(2130,3715) ; v1(3030,2813) 3037.65,2820.65 3037.65,2836.51 3045.05,2843.91 v1(3045,3015) v1(3045,3015)
5V0USB: C8.2 C11.2 D3.1 L2.1 | length 772.5
  Top Layer w10: v1(1860,3345) 2004.02,3345 C8.2@2005,3345.98 ; v1(1860,3645) 1825.75,3610.75 1825.75,3581.65 L2.1@1809.09,3565 1939.06,3565 C11.2@1940,3564.06 2029.01,3564.06 D3.1@2033.07,3560
  Bottom Layer w10: v1(1860,3345) v1(1860,3645)
"Alarm on / off": R28.2 S1.2 U3.59 | length 2023
  Top Layer w8: U3.59@3703.74,2728.11 3703.74,2361.07 3725,2339.81 v1(3725,2330)
  Bottom Layer w8: R28.2@2894.57,1054.53 S1.2@2894.57,1179.21 2894.57,1486.25 3428.12,2050.42 cw(c3455,2025) 3429.95,2052.23 v1(3725,2330)
Auto: R16.1 U3.57 | length 837
  Top Layer w8: U3.57@3664.37,2728.11 3664.37,2263.94 3664.37,2260.63 3787.62,2125.11 ccw(c3815,2150) 3791.26,2121.62 3865.47,2059.53 3868.79,2059.53 R16.1@3950,2059.53
"Auto / Manual": R27.2 S1.1 U3.26 | length 2363.2
  Top Layer w8: S1.1@2994.57,1179.21 3036.09,1179.21 3464.4,1607.52 3466.75,1609.87 3474.24,1975.21 3529.47,2030.43 3529.47,2136.35 3494.84,2170.98 3419.6,2246.23 3419.6,2252.85 3419.85,2703.36 3503.39,2786.9 3503.39,2801.14 3625,2922.75 U3.26@3625,3169.06
BOOT0: P3.1 R40.1 U3.60 | length 854.2
  Top Layer w10: U3.60@3723.43,2728.11 3723.77,2727.76 3723.77,2406.23 3862,2268 4049.6,2268 4050.8,2269.2 R40.1@4155,2165
CLOCK: pad.4 R26.1 U3.53 | length 1229.3
  Top Layer w8: pad.4@3532.84,2504.99 3532.84,2575.34 3585.63,2628.14 U3.53@3585.63,2728.11
  Bottom Layer w8: R26.1@2581.98,2496.67 2599.63,2514.32 2599.63,2521.45 2614.41,2536.23 3050.97,2536.23 3082.21,2504.99 pad.4@3532.84,2504.99
CMD: pad.3 R21.2 R31.1 U3.54 | length 1403.4
  Top Layer w8: pad.3@3580,2440 3577.13,2544.62 ; U3.54@3605.32,2728.11 3604.59,2727.38 3604.59,2689.25 3603.54,2688.2 3603.54,2610.91 3577.13,2584.51 3577.13,2544.62 ; 3577.13,2544.62 ccw(c3585.14,2544.62) 3577.14,2544.4 cw(c3585.14,2544.62) 3577.13,2544.62
  Bottom Layer w8: R31.1@2501.03,2391.67 R21.2@2581.98,2391.67 2599.63,2409.32 2599.63,2416.45 2623.18,2440 pad.3@3580,2440
Cooler: R29.2 S1.3 U3.23 | length 3645.2
  Top Layer w8: S1.3@2794.57,1179.21 2794.57,1738.52 3325,2268.96 v1(3325,2775) ; v1(3335,3500) 3330,3505 3330,3630 3479.56,3779.56 3582.57,3779.56 3597.35,3764.78 3597.35,3763.56 3615,3745.91 R29.2@3615,3740 3615,3495.51 3685.83,3424.67 3685.83,3208.96 3684.78,3207.91 3684.78,3169.78 U3.23@3684.06,3169.06
  Bottom Layer w8: v1(3325,2775) 3330,2780 3330,3495 v1(3335,3500)
"Cooler on/off": R43.1 U3.20 | length 2899.4
  Top Layer w8: R43.1@1559.57,3923.62 1829.93,3923.62 1956.31,4050 3279.74,4050 3534.19,3795.56 3625.62,3795.56 3702.66,3718.53 3705,3716.18 3705,3615 3704.13,3604.89 3704.13,3600.87 3706.45,3598.55 3743.11,3561.89 3743.11,3204.49 U3.20@3743.11,3169.06
D4: LCD1.11 U3.61 | length 2990.6
  Top Layer w8: U3.61@3743.11,2728.11 3743.11,2763.54 3743,2904.97 cw(c3780,2905) 3743,2905.03 v1(3743.11,3063.11) ; LCD1.11@4973.35,5146.69 4973.38,5146.65 v1(4973.42,4776.6) v1(4973.42,4776.6)
  Bottom Layer w8: v1(3743.11,3063.11) 3743,3484.99 3743.11,3652.76 3745.45,3655.11 4556.35,4466 4662.69,4466 4945.83,4746.12 4950.52,4750.81 v1(4973.42,4776.6)
D5: LCD1.12 U3.62 | length 3034.6
  Top Layer w8: U3.62@3762.8,2728.11 3762.8,2881.43 v1(3780,2905) ; LCD1.12@5073.35,5146.69 5074.17,5145.87 5074.17,4825.83 v1(5075,4825)
  Bottom Layer w8: v1(3780,2905) 3884.02,3009.02 3884.02,3596.34 3984,3696.33 3984,3789 4265.84,4070.84 4265.84,4143.16 4572.67,4450 4695.73,4450 v1(5075,4825)
D6: LCD1.13 U3.29 | length 2704.1
  Top Layer w8: U3.29@3565.94,3169.06 3565.94,3410.94 v1(3595,3440) ; v1(5170,4985) 5171.67,4986.67 5171.67,5145.02 LCD1.13@5173.35,5146.69
  Bottom Layer w8: v1(3595,3440) 3602.33,3440 3724.77,3562.44 3727.11,3659.39 4549.72,4482 4628.79,4484.34 4950.01,4805.25 v1(5170,4985)
D7: LCD1.14 U3.30 | length 2819.3
  Top Layer w8: U3.30@3546.26,3169.06 3546.99,3169.79 3546.99,3636.99 v1(3550,3640)
  Bottom Layer w8: v1(3550,3640) 3685.09,3640 4545.09,4500 4596.55,4500 5112.28,4994.07 5231.35,5113.14 5249.33,5113.14 5273.35,5137.16 LCD1.14@5273.35,5146.69
DATA_0: R22.2 R25.1 U3.39 | length 1611.7
  Top Layer w8: v1(2370,2608) 2471.51,2709.51 2471.51,2759.38 v1(2479.36,2767.23) ; v1(3100,3125) 3246.89,2978.11 U3.39@3434.06,2978.11
  Bottom Layer w8: v1(2370,2608) 2378.41,2608 2411.64,2641.23 2468.6,2641.23 2483.38,2626.45 2483.38,2619.32 R22.2@2501.03,2601.67 R25.1@2581.98,2601.67 ; v1(2479.36,2767.23) 2480.31,2766.28 2728.1,2766.28 2776.51,2814.69 2990.8,3013.51 ccw(c2965.63,3040.63) 2991.87,3014.55 2995.39,3018.09 ccw(c2970,3045) 2996.45,3019.13 v1(3100,3125)